# Altium PCB dual monostable.PcbDoc
Units mil, origin at the board's own origin, x right, y up, seen from the top; angles counter-clockwise.
Board outline 6000 x 4000 mil, 2 copper layers (Top Layer, Bottom Layer); 17 components, 14 nets, 49 pads, 0 vias.
Unrouted connection lines stored in the file: 34.
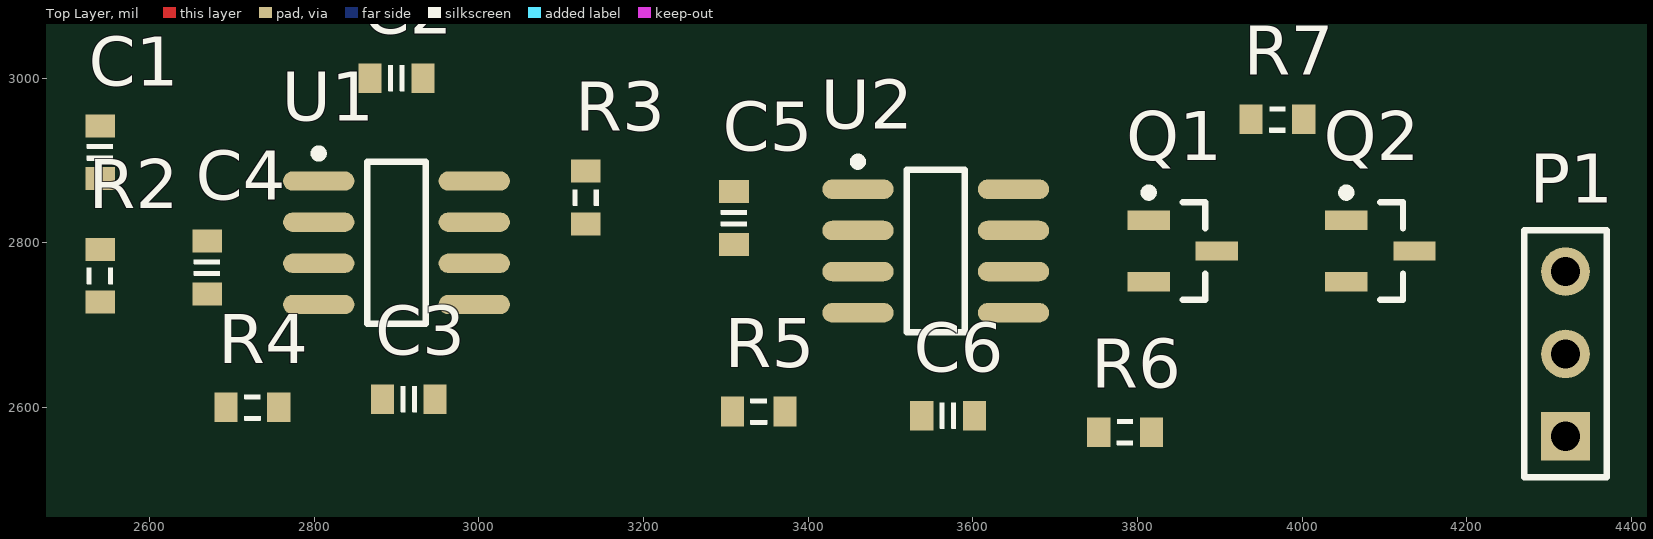
[diagram p0: Top Layer view]
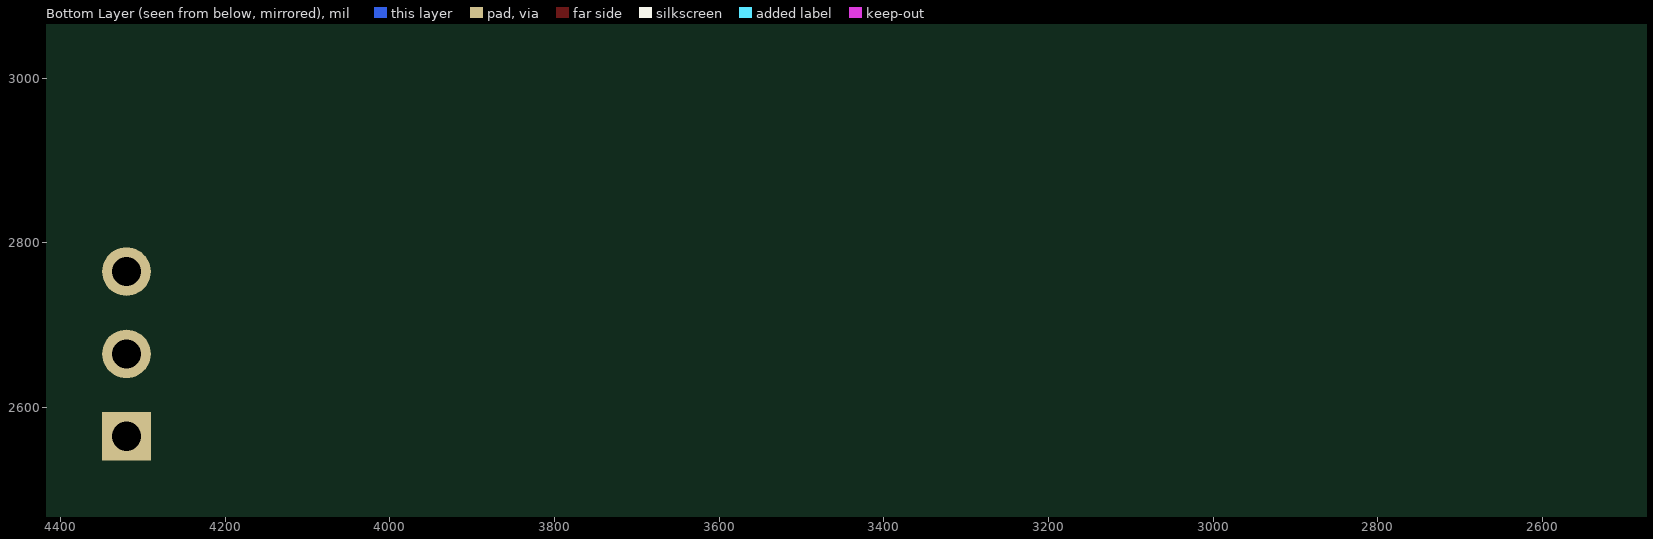
[diagram p1: Bottom Layer view, seen from below]

## Layer stack, top to bottom
Top Layer: signal copper 1.4
Dielectric: dielectric 12.6, FR-4, Dk 4.8
Bottom Layer: signal copper 1.4

## Board outline
1000,1000 7000,1000 7000,5000 1000,5000

## Design rules (kind name [scope] priority, off if disabled: settings)
Clearance [All] p1: gap=10
PolygonConnect [All] p1: connectstyle=Relief reliefconductorwidth=10 reliefentries=4 polygonreliefangle="90 Angle"
RoutingVias [All] p1: holewidth=28 width=50 viastyle="Through Hole" minholewidth=28 minwidth=50 maxholewidth=28 maxwidth=50
SilkscreenOverComponentPads [All] p1: minsilkscreentomaskgap=10
SolderMaskExpansion [All] p1: expansion=4
Width [All] p1: maxlimit=10 minlimit=10 preferedwidth=10
27 further rules are at their usual default settings.

## Components (designator, comment, footprint, x,y, rotation, side; value= is the part's Value field where it differs from the comment)
C1 "Cap_0603" CAP_0603 2540,2910 r90 top
C2 "Cap_0603" CAP_0603 2900,3000 r0 top
C3 "Cap_0603" CAP_0603 2915,2610 r0 top
C4 "Cap_0603" CAP_0603 2670,2770 r90 top
C5 "Cap_0603" CAP_0603 3310,2830 r270 top
C6 "Cap_0603" CAP_0603 3570,2590 r0 top
P1 "Header 3" HDR1X3 4320,2565 r90 top
Q1 "MMBT3904" SOT23_N 3855,2790 r0 top
Q2 "MMBT3906" SOT23_N 4095,2790 r0 top
R2 "Res_0603" RES_0603 2540,2760 r270 top
R3 "Res_0603" RES_0603 3130,2855 r90 top
R4 "Res_0603" RES_0603 2725,2600 r0 top
R5 "Res_0603" RES_0603 3340,2595 r0 top
R6 "Res_0603" RES_0603 3785,2570 r180 top
R7 "Res_0603" RES_0603 3970,2950 r180 top
U1 "NE555D" D008_N 2900,2800 r0 top
U2 "NE555D" D008_N 3555,2790 r0 top

## Footprints (in the part's own frame and the unit in brackets; to place one, negate y for a bottom-side part, rotate by r counter-clockwise, add the part's x,y. Pads: shape width x height; smd on the part's side, far side on the other; paste and mask are expansions set on the pad)
CAP_0603 [mil]
  rect 28x36 smd: 1(-32,0) 2(32,0)
  silkscreen extent -10,-16 10,16, body extent -31,-16 32,16, height 36
D008_N [mm] "SOIC, 8-Leads, Body 4.9x3.9mm, Pitch 1.27mm, IPC Medium Density"
  oval 2.2x0.6 smd: 1(-2.4,1.905) 2(-2.4,0.635) 3(-2.4,-0.635) 4(-2.4,-1.905) 5(2.4,-1.905) 6(2.4,-0.635) 7(2.4,0.635) 8(2.4,1.905)
  silkscreen extent -2.52,-2.5 0.9,2.88, body extent -1.95,-2.45 1.95,2.45, height 1.75
HDR1X3 [mm] "Connector; Header; 3 Position"
  rect 1.5x1.5 hole 0.9: 1(0,0)
  round 1.5 hole 0.9: 2(2.54,0) 3(5.08,0)
  silkscreen extent -1.27,-1.27 6.35,1.27
RES_0603 [mil]
  rect 28x36 smd: 1(-32,0) 2(32,0)
  silkscreen extent -10,-16 10,16, body extent -31,-16 32,16, height 20
SOT23_N [mm] "SOT23, 3-Leads, Body 2.9x1.3mm, Pitch 0.95mm, Lead Span 2.3mm, IPC Medium Density"
  rect 1.3x0.6 smd: 1(-1.05,0.95) 2(-1.05,-0.95) 3(1.05,0)
  silkscreen extent -1.17,-1.5 0.7,1.92, body extent -0.7,-1.5 0.7,1.5, height 1.1

## Part data
C1 C2 C3 C4 C5 C6: "Capacitor"
P1: "Header, 3-Pin"
Q1: "NPN Switching Transistor"
Q2: "PNP Switching Transistor"
R2 R3 R4 R5 R6 R7: "Resistor"
U1 U2: "Precision Timer"

## Nets (pads, with @x,y where several pads share a name; then routed paths per layer and width w, separated by ;. In a path a pad name is that pad's centre, name@x,y a point inside that pad or via, vN(x,y) a via of type N, cw(c..) or ccw(c..) an arc to the next point about the centre after c; other vN are vias at no path point)
GND: C1.2 C2.1 C3.1 C5.1 C6.1 P1.3 Q1.2 U2.1
NetC1_1: C1.1 R2.1 U1.2
NetC2_2: C2.2 R3.1 U1.6 U1.7
NetC3_2: C3.2 U1.5
NetC4_1: C4.1 R4.1 U2.2
NetC4_2: C4.2 U1.3
NetC5_2: C5.2 R5.1 U2.6 U2.7
NetC6_2: C6.2 U2.5
NetP1_2: P1.2 Q2.3
NetQ1_1: Q1.1 R6.1
NetQ1_3: Q1.3 R7.2
NetQ2_1: Q2.1 R7.1
NetR6_2: R6.2 U2.3
VCC: P1.1 Q2.2 R2.2 R3.2 R4.2 R5.2 U1.4 U1.8 U2.4 U2.8
pads on no net: U1.1